# Altium PCB arduinoLeonardoOwn.PcbDoc
Units mil, origin at the board's own origin, x right, y up, seen from the top; angles counter-clockwise.
Board outline 1220 x 1715 mil, 2 copper layers (Top Layer, Bottom Layer); 26 components, 37 nets, 132 pads, 78 vias.
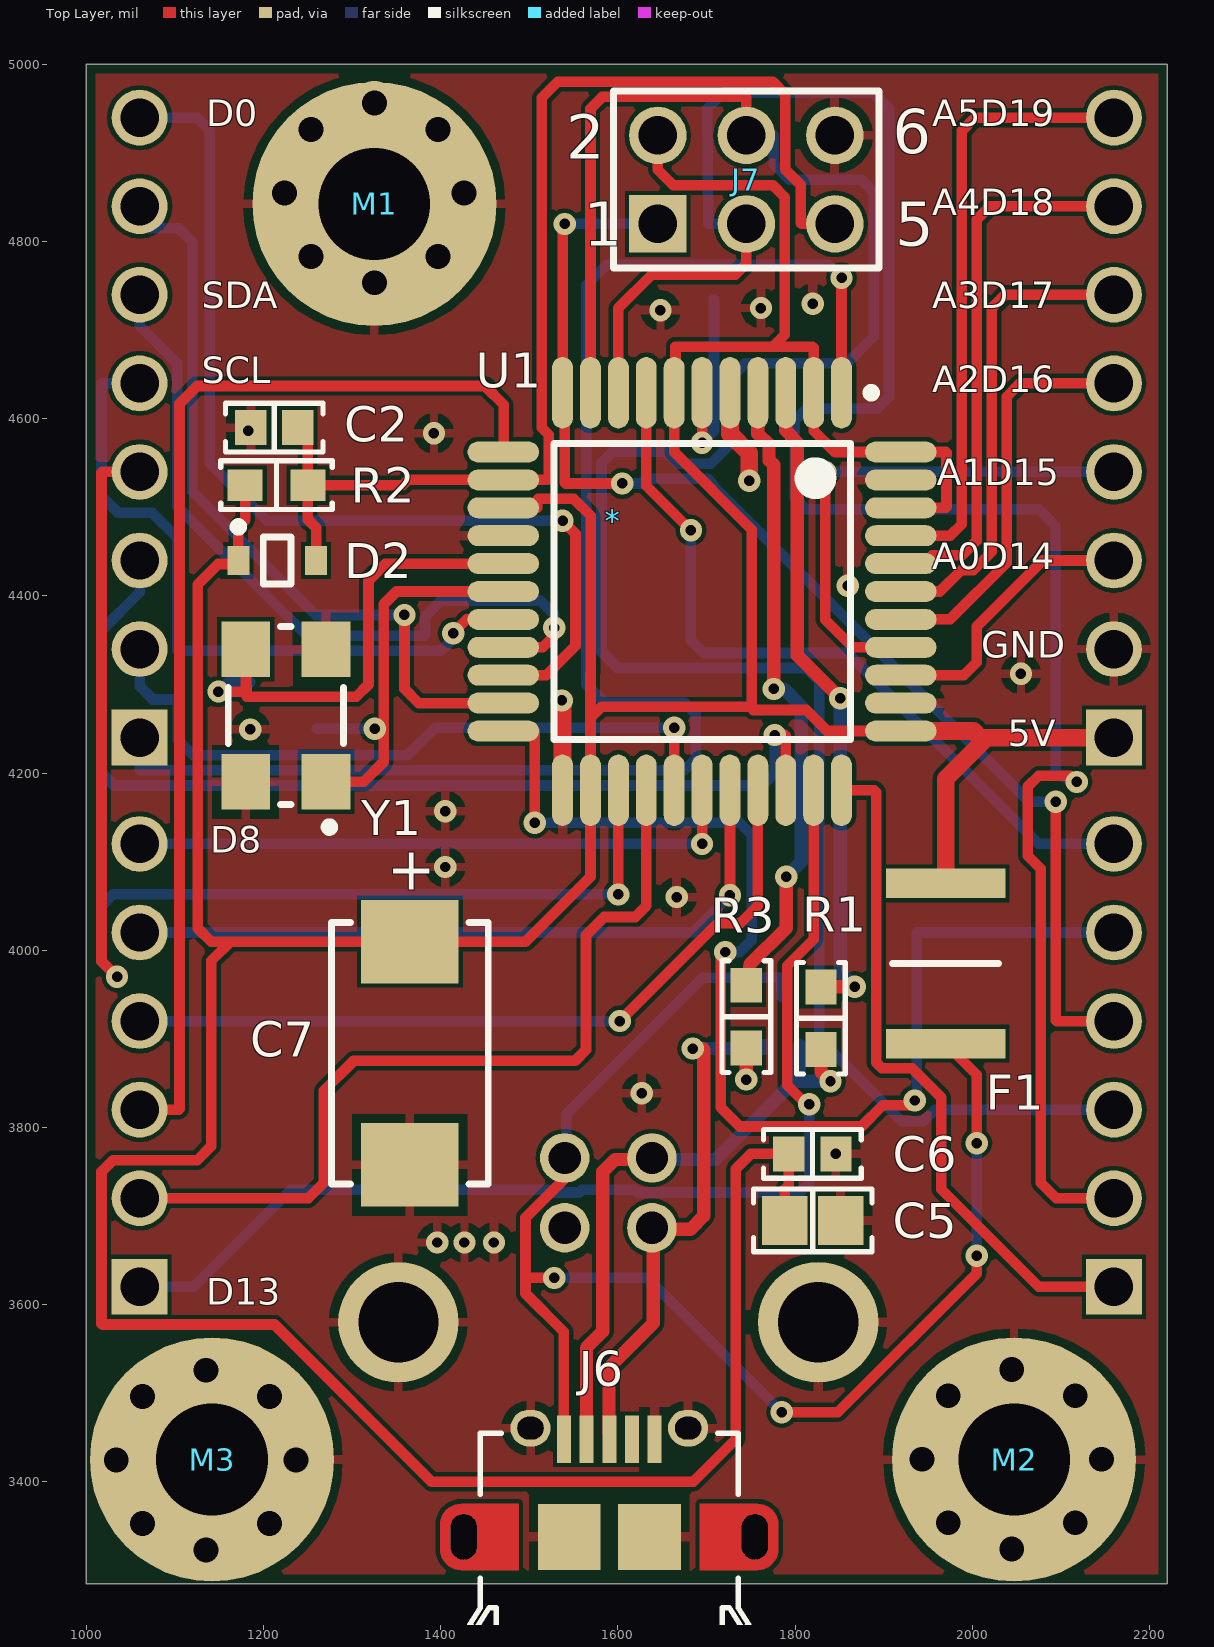
[diagram p0: Top Layer view]
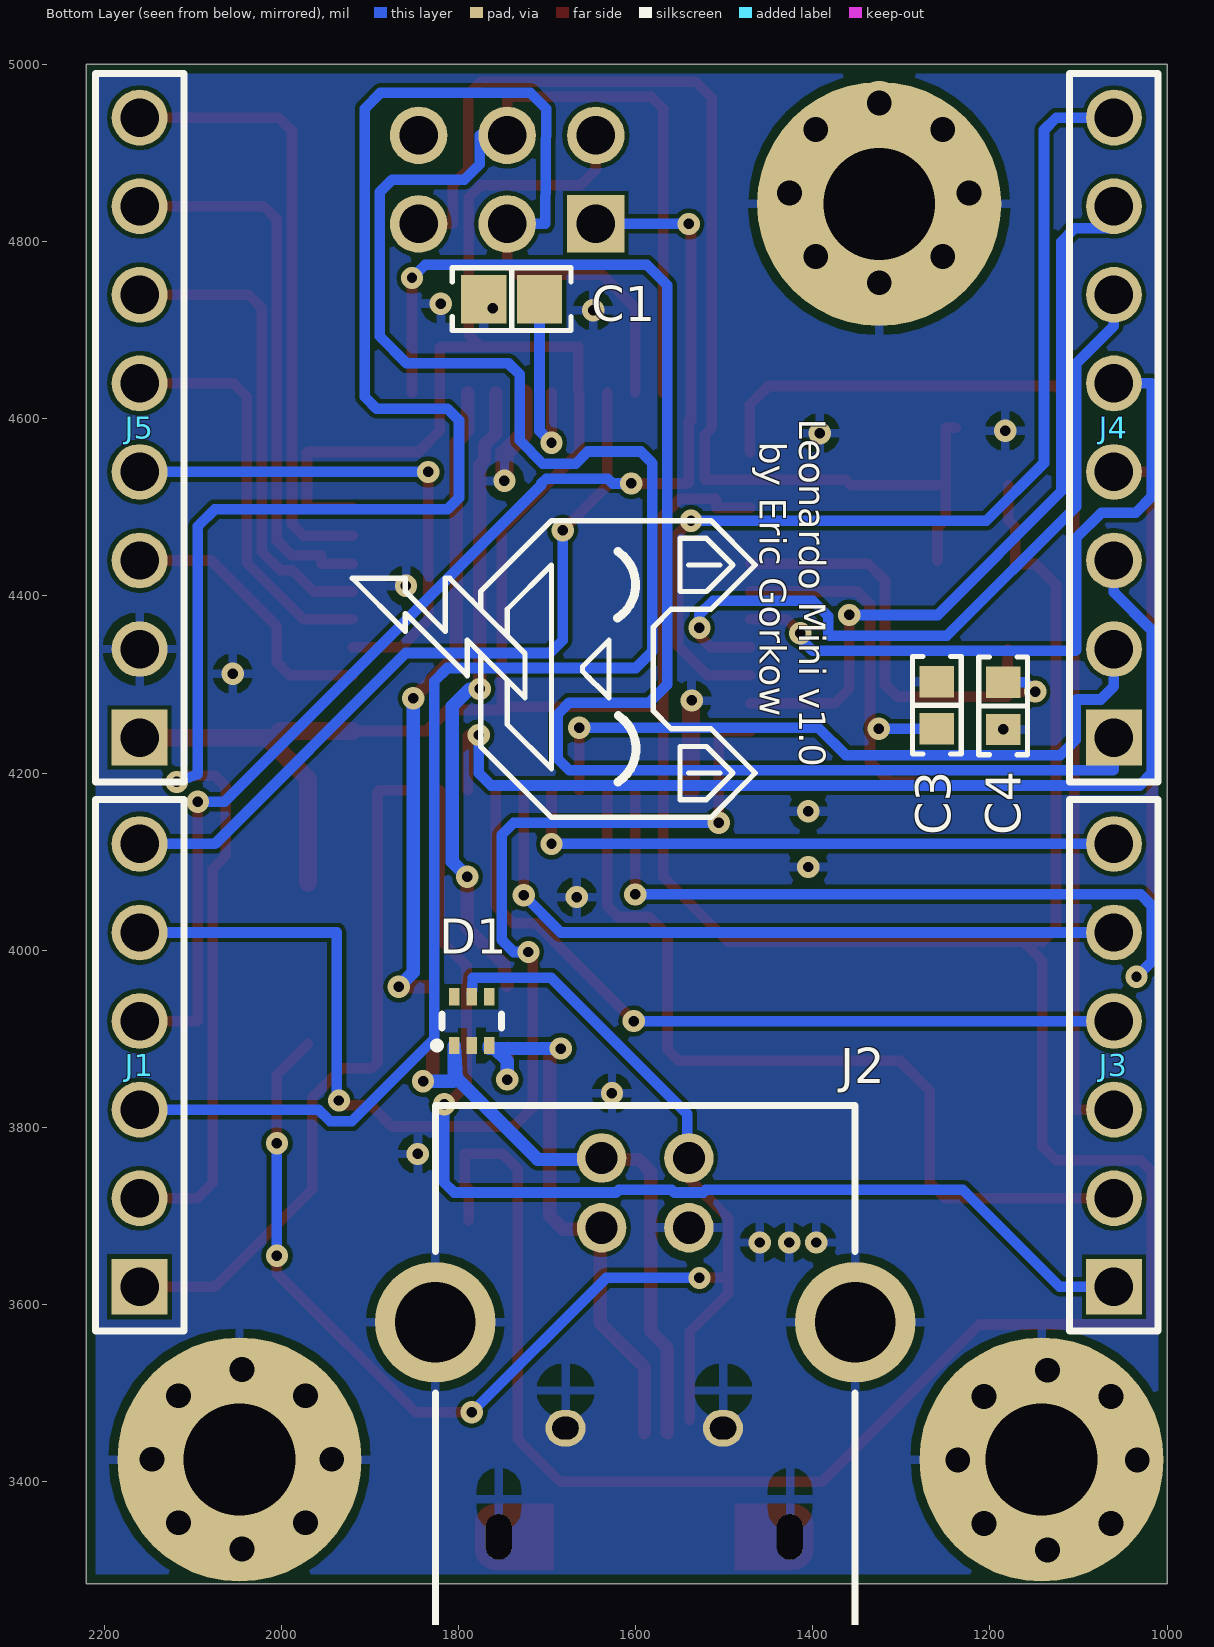
[diagram p1: Bottom Layer view, seen from below]
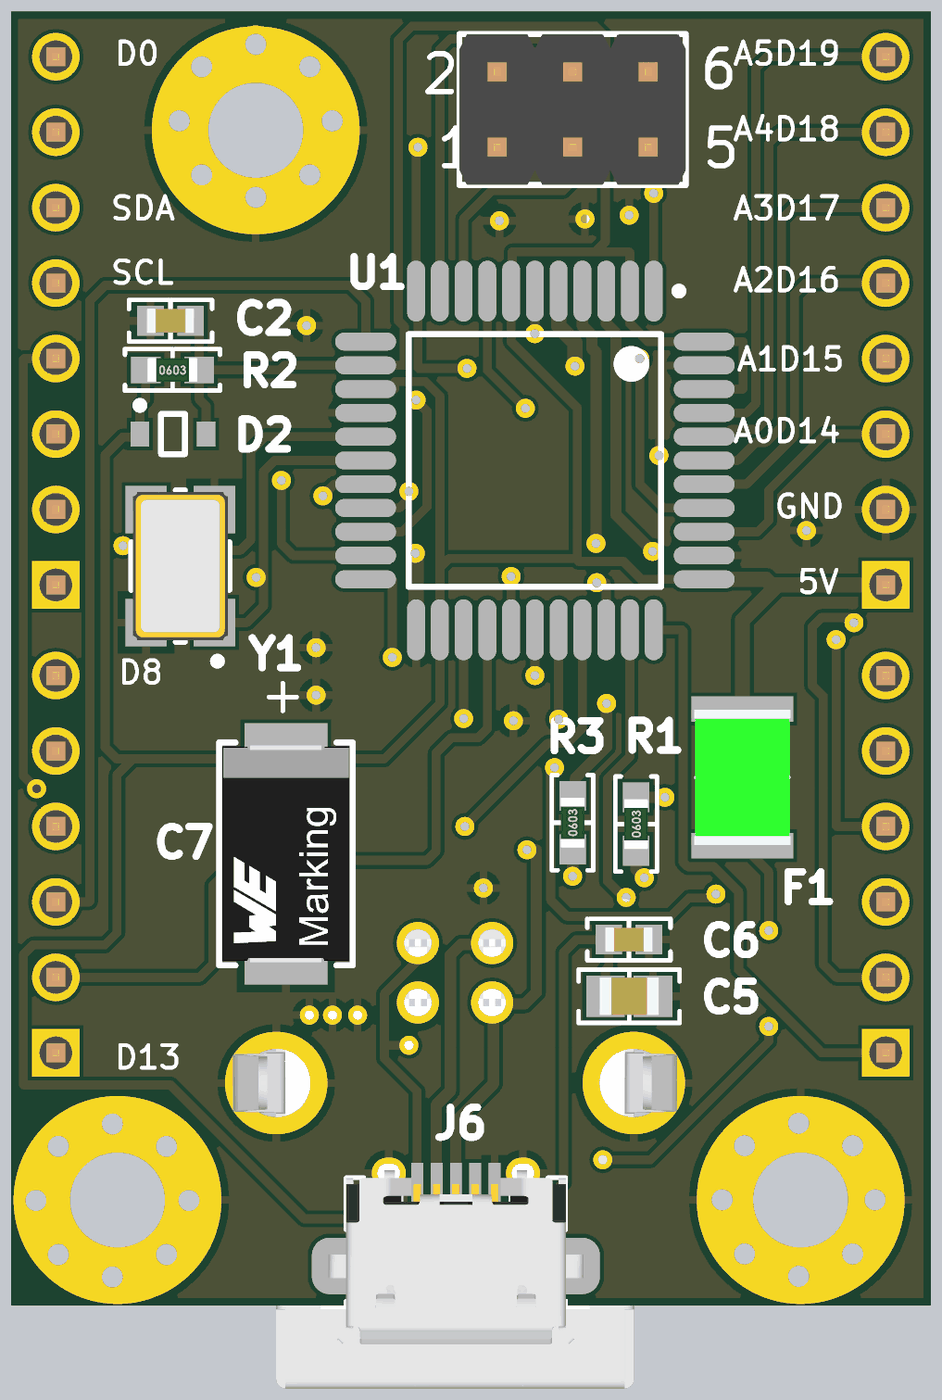
[diagram p2: 3D render of the assembled board from above, using the file's embedded part models]
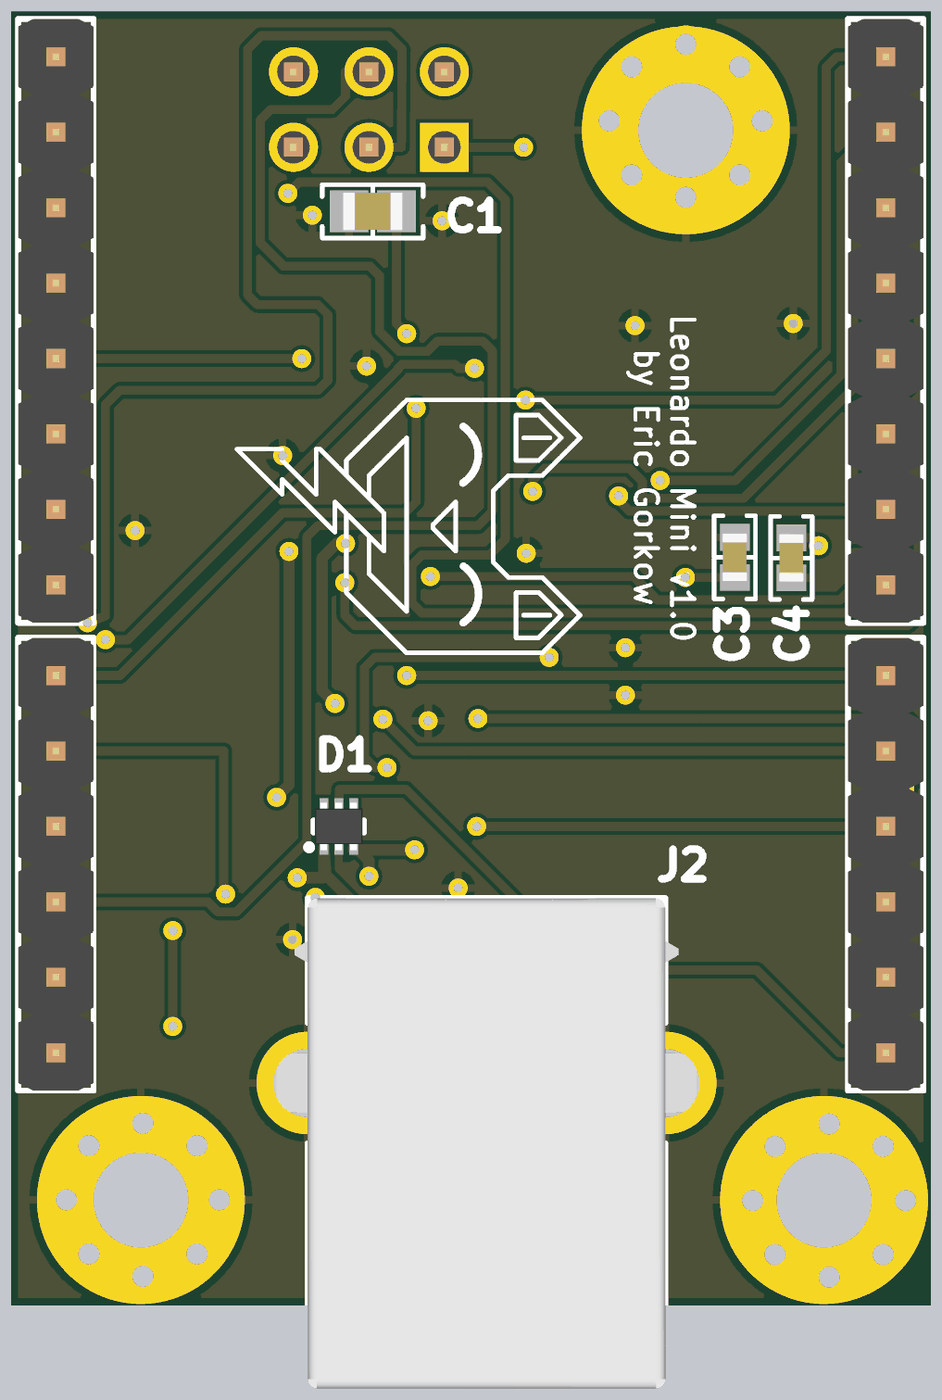
[diagram p3: 3D render of the assembled board from below, using the file's embedded part models]

## Layer stack, top to bottom
Top Solder: solder mask 0.4, Solder Resist, Dk 3.5
Top Layer: signal copper 1.4
Dielectric 1: dielectric 12.6, FR-4, Dk 4.8
Bottom Layer: signal copper 1.4
Bottom Solder: solder mask 0.4, Solder Resist, Dk 3.5

## Board outline
1000,3285 2220,3285 2220,5000 1000,5000

## Design rules (kind name [scope] priority, off if disabled: settings)
AcuteAngle [All] p1: minimum=4.50000000000000E+0001 checktracksonly=FALSE
BoardOutlineClearance [All] p1: gap=10 ignorepadtopadclearanceinfootprint=FALSE
Clearance [All] p1: gap=5 ignorepadtopadclearanceinfootprint=FALSE
ComponentClearance [All] p1: gap=3.94 collisioncheckmode=3 verticalgap=10 showdistances=FALSE
DiffPairsRouting [All] p1: maxlimit=10 minlimit=3.94 mostfreqgap=10 toplayer_minwidth=11.81 toplayer_maxwidth=15 toplayer_prefwidth=15 bottomlayer_minwidth=11.81 bottomlayer_maxwidth=15 bottomlayer_prefwidth=15 maxuncoupledlength=500
FanoutControl Fanout_Small [All] p1 off: bgadir=Out bgaviamode=Centered fanoutstyle=Auto fanoutdirection=Alternating viagrid=1 // Protel DXP Scope 1 Expression Was: (CompPinCount < 5)   Fanout_Small (Default Rule)
FanoutControl Fanout_Default [All] p2: bgadir=Out bgaviamode=Centered fanoutstyle=Auto fanoutdirection=Alternating viagrid=1 // Fanout_Default (Default Rule)
FanoutControl Fanout_SOIC [All] p3 off: bgadir=Out bgaviamode=Centered fanoutstyle=Auto fanoutdirection=Alternating viagrid=1 // Protel DXP Scope 1 Expression Was: IsSOIC   Fanout_SOIC (Default Rule)
FanoutControl Fanout_BGA [All] p4 off: bgadir=Out bgaviamode=Centered fanoutstyle=Auto fanoutdirection=Alternating viagrid=1 // Protel DXP Scope 1 Expression Was: IsBGA   Fanout_BGA (Default Rule)
FanoutControl Fanout_LCC [All] p5 off: bgadir=Out bgaviamode=Centered fanoutstyle=Auto fanoutdirection=Alternating viagrid=1 // Protel DXP Scope 1 Expression Was: IsLCC   Fanout_LCC (Default Rule)
HoleSize [All] p1: absolutevalues=TRUE maxlimit=275.59 minlimit=7.87 maxpercent=80.000 minpercent=20.000
MinimumAnnularRing [All] p1: minimumring=2.99
MinimumSolderMaskSliver [All] p1: minsoldermaskwidth=7.87
PolygonConnect [All] p1: connectstyle=Relief reliefconductorwidth=10 reliefentries=4 polygonreliefangle="90 Angle" airgapwidth=10
RoutingVias [All] p1: holewidth=11.81 width=25.2 viastyle="Through Hole" minholewidth=11.81 minwidth=24 maxholewidth=28 maxwidth=50
SMDEntry [All] p1 off: side=TRUE corner=TRUE anyangle=FALSE // Protel DXP Scope 1 Expression Was: not IsRoundPad
SMDToCorner [All] p1: distance=60000
SilkToSolderMaskClearance [All] p1 off: minsilkscreentomaskgap=10 clearancetoexposedcopper=TRUE // Protel DXP Scope 1 Expression Was: IsPad
SolderMaskExpansion ViaTenting [IsVia] p1: expansion=-393.7
SolderMaskExpansion [All] p2: expansion=0
Width [All] p1: maxlimit=118.11 minlimit=6 preferedwidth=12
20 further rules are at their usual default settings.

## Classes and differential pairs
differential pair USB_D: +USB_D_P -USB_D_N
differential pair MCU_D: +MCU_D_P -MCU_D_N

## Components (designator, comment, footprint, x,y, rotation, side; value= is the part's Value field where it differs from the comment)
* "Signature" Signature 1595,4485 r270 top
C1 "SMD Capacitor; 1u; 6.3V" "CAP 0805/2012" 1740,4735 r180 bottom value=1u
C2 "SMD Capacitor; 100n; 6.3V" "CAP 0603/1608" 1212.05,4590 r0 top value=100n
C3 "SMD Capacitor; 22p; 6.3V" "CAP 0603/1608" 1260,4276.57 r270 bottom value=22p
C4 "SMD Capacitor; 22p; 6.3V" "CAP 0603/1608" 1185,4275.83 r90 bottom value=22p
C5 "SMD Capacitor; 1u; 6.3V" "CAP 0805/2012" 1820,3695 r180 top value=1u
C6 "SMD Capacitor; 100n; 6.3V" "CAP 0603/1608" 1819.61,3770 r180 top value=100n
C7 "220 uF, 6.3 VDC" WCAP-PHGP_7.3x4.3x1.9 1365,3883.64 r90 top
D1 "5 Vdc, 2+1 Channel" "WE-TVS_High Speed_SOT563" 1785,3920 r180 bottom
D2 "NSR1020MW2T1G" ONSC-SOD-323-2-477-02_V 1215.31,4440 r0 top
F1 "MF-MSMF200-2" FUSC4632X85N 1970,3985 r90 top
J1 "61300611121" 61300611121 2160,3870 r90 bottom
J2 "USB 2.0 Type B Receptacle" 61400416121 1589.14,3500.08 r180 bottom
J3 "61300611121" 61300611121 1060,3870 r90 bottom
J4 "61300811121" 61300811121 1060,4590 r90 bottom
J5 "61300811121" 61300811121 2160,4590 r90 bottom
J6 "Micro USB 2.0 Type AB Receptacle" 629105150921 1590.28,3337.6 r0 top
J7 "61300621121" 61300621121 1745,4870 r0 top
M1 "mounting pad" MOUNTING_PAD_M3#1 1325,4855 r0 top
M2 "mounting pad" MOUNTING_PAD_M3#2 2044.58,3425.2 r0 top
M3 "mounting pad" MOUNTING_PAD_M3#3 1135,3424.32 r0 top
R1 "SMD Resistor; 22" "STACKPOLE CSR0603" 1829.21,3923.18 r90 top value=22
R2 "SMD Resistor; 10k" "STACKPOLE CSR0603" 1214.57,4525.03 r0 top value=10k
R3 "SMD Resistor; 22" "STACKPOLE CSR0603" 1745,3925 r90 top value=22
U1 "ATmega32U4-AU" 44ML_M 1695,4405 r270 top
Y1 "16MHz, +/-50ppm, 18pF" WE-XTAL_CFPX-104 1225,4265 r90 top

## Footprints (in the part's own frame and the unit in brackets; to place one, negate y for a bottom-side part, rotate by r counter-clockwise, add the part's x,y. Pads: shape width x height; smd on the part's side, far side on the other; paste and mask are expansions set on the pad)
44ML_M [mm] "Thin QFP, 44-Leads, Body 10x10mm, Pitch 0.8mm, IPC Low Density"
  oval 2.05x0.6 smd: 1(-5.7,4) 2(-5.7,3.2) 3(-5.7,2.4) 4(-5.7,1.6) 5(-5.7,0.8) 6(-5.7,0) 7(-5.7,-0.8) 8(-5.7,-1.6) 9(-5.7,-2.4) 10(-5.7,-3.2) 11(-5.7,-4) 23(5.7,-4) 24(5.7,-3.2) 25(5.7,-2.4) 26(5.7,-1.6) 27(5.7,-0.8) 28(5.7,0) 29(5.7,0.8) 30(5.7,1.6) 31(5.7,2.4) 32(5.7,3.2) 33(5.7,4)
  oval 0.6x2.05 smd: 12(-4,-5.7) 13(-3.2,-5.7) 14(-2.4,-5.7) 15(-1.6,-5.7) 16(-0.8,-5.7) 17(0,-5.7) 18(0.8,-5.7) 19(1.6,-5.7) 20(2.4,-5.7) 21(3.2,-5.7) 22(4,-5.7) 34(4,5.7) 35(3.2,5.7) 36(2.4,5.7) 37(1.6,5.7) 38(0.8,5.7) 39(0,5.7) 40(-0.8,5.7) 41(-1.6,5.7) 42(-2.4,5.7) 43(-3.2,5.7) 44(-4,5.7)
  silkscreen extent -5.82,-4.25 4.25,4.98, body extent -5,-5 5,5, height 1.2
61300611121 [mm] "6 pins, 1 row, straight, gold plating"
  rect 1.6x1.6 hole 1.1: 1(-6.35,0)
  round 1.6 hole 1.1: 2(-3.81,0) 3(-1.27,0) 4(1.27,0) 5(3.81,0) 6(6.35,0)
  silkscreen extent -7.62,-1.27 7.62,1.27, body extent -7.62,-1.27 7.62,1.27, height 8.57
61300621121 [mm] "2.54 mm THT Dual Pin Header, 6p"
  rect 1.65x1.65 hole 1.1: 1(-2.54,-1.27)
  round 1.65 hole 1.1: 2(-2.54,1.27) 3(0,-1.27) 4(0,1.27) 5(2.54,-1.27) 6(2.54,1.27)
  silkscreen extent -3.81,-2.54 3.81,2.54, body extent -3.81,-2.54 3.81,2.54, height 8.59
61300811121 [mm] "8 pins, 1 row, straight, gold plating"
  rect 1.6x1.6 hole 1.1: 1(-8.89,0)
  round 1.6 hole 1.1: 2(-6.35,0) 3(-3.81,0) 4(-1.27,0) 5(1.27,0) 6(3.81,0) 7(6.35,0) 8(8.89,0)
  silkscreen extent -10.16,-1.27 10.16,1.27, body extent -10.16,-1.27 10.16,1.27, height 8.57
61400416121 [mm] "USB 2.0 Type B Horizontal"
  round 1.42 hole 0.92: 1(1.25,6.74) 2(-1.25,6.74) 3(-1.25,4.74) 4(1.25,4.74)
  round 3.45 hole 2.3: Shell(-6.02,2.03) Shell(6.02,2.03)
  silkscreen extent -6.02,-8.25 6.02,8.25, body extent -7.48,-8.25 7.48,8.25, height 11.15
629105150921 [mm] "Micro USB 2.0 Type AB, Receptacle, Horizontal, SMT"
  rect 0.4x1.35 smd: 1(-1.3,2.8) 2(-0.65,2.8) 3(0,2.8) 4(0.65,2.8) 5(1.3,2.8)
  oval 0.75x1.3 hole 0.75 slot 1.3 at 90 deg: Shell(-4.175,0) Shell(4.175,0)
  oval 1.15x1.05 hole 0.65 slot 0.75 at 0 deg: Shell(-2.26,3.12) Shell(2.26,3.12)
  rect 1.8x1.9 smd: Shell(-1.15,0) Shell(1.15,0)
  Top Layer region: -4.25,-0.95 -4.48,-0.904 -4.674,-0.774 -4.804,-0.58 -4.85,-0.35 -4.85,-0.35 -4.85,0.35 -4.804,0.58 -4.674,0.774 -4.48,0.904 -4.25,0.95 -4.25,0.95 -2.6,0.95 -2.6,-0.95
  Top Layer pour cut-out: -4.25,-0.65 -4.365,-0.627 -4.462,-0.562 -4.527,-0.465 -4.55,-0.35 -4.55,-0.35 -4.55,0.35 -4.527,0.465 -4.462,0.562 -4.365,0.627 -4.25,0.65 -4.25,0.65 -4.1,0.65 -3.985,0.627 -3.888,0.562 -3.823,0.465 -3.8,0.35 -3.8,0.35 -3.8,-0.35 -3.823,-0.465 -3.888,-0.562 -3.985,-0.627 -4.1,-0.65 -4.1,-0.65
  Top Layer region: 4.25,-0.95 4.48,-0.904 4.674,-0.774 4.804,-0.58 4.85,-0.35 4.85,-0.35 4.85,0.35 4.804,0.58 4.674,0.774 4.48,0.904 4.25,0.95 4.25,0.95 2.6,0.95 2.6,-0.95
  silkscreen extent -4,-2.64 4,2.97, body extent -4.3,-2.64 4.3,3.23, height 2.76
"CAP 0603/1608" [mm] "Chip Capacitor, 2-Leads, Body 1.60x0.80mm, IPC Medium Density"
  rect 0.9x1 smd: 1(-0.675,0) 2(0.675,0)
  silkscreen extent -1.4,-0.7 1.4,0.7, body extent -0.8,-0.41 0.8,0.41, height 0.82
"CAP 0805/2012" [mm] "Chip Capacitor, 2-Leads, Body 2.00x1.20mm, IPC Medium Density"
  rect 1.3x1.4 smd: 1(-0.8,0) 2(0.8,0)
  silkscreen extent -1.7,-0.9 1.7,0.9, body extent -1,-0.64 1,0.64, height 1.26
FUSC4632X85N [mm]
  rect 0.85x3.43 smd: 1(-2.3,0) 2(2.3,0)
  silkscreen extent 0,-1.52 0,1.52, body extent -2.27,-1.62 2.28,1.62, height 0.85
MOUNTING_PAD_M3#1 [mm] "M3 mounting pad"
  round 7 hole 3.2: 1(0,-0.317)
MOUNTING_PAD_M3#2 [mm] "M3 mounting pad"
  round 7 hole 3.2: 1(0.068,-0.005)
MOUNTING_PAD_M3#3 [mm] "M3 mounting pad"
  round 7 hole 3.2: 1(0.171,0.017)
ONSC-SOD-323-2-477-02_V [mm] "SOD, 2-Leads, Body 1.7x1.25mm"
  rect 0.63x0.83 smd: 1(-1.115,0) 2(1.115,0)
  silkscreen extent -1.24,-0.67 0.4,1.09, body extent -0.85,-0.63 0.85,0.63, height 1.06
Signature [mil]
"STACKPOLE CSR0603" [mm] "Chip Resistor, 2-Leads, Body 1.60x0.80mm, IPC Medium Density"
  rect 1x0.9 smd: 1(-0.9,0) 2(0.9,0)
  silkscreen extent -1.6,-0.7 1.6,0.7, body extent -0.85,-0.4 0.85,0.4, height 0.45
WCAP-PHGP_7.3x4.3x1.9 [mm] "Aluminum Polymer Capacitors, body 7.3x4.3mm"
  rect 2.4x2.8 smd: 1(-3.2,0) 2(3.2,0)
  silkscreen extent -3.75,-2.25 3.75,2.25, body extent -3.65,-2.15 3.65,2.15, height 1.9
"WE-TVS_High Speed_SOT563" [mm] "TVS Diode, package SOT563"
  rect 0.3x0.5 smd: 1(-0.5,-0.7) 2(0,-0.7) 3(0.5,-0.7) 4(0.5,0.7) 5(0,0.7) 6(-0.5,0.7)
  silkscreen extent -1.1,-0.8 0.85,0.2, body extent -0.8,-0.8 0.8,0.8, height 0.54
WE-XTAL_CFPX-104 [mm] "Quartz Crystal, size CFPX-104, body 5x3.2mm"
  rect 1.6x1.4 smd: 1(-1.9,-1.15) 2(1.9,-1.15) 3(1.9,1.15) 4(-1.9,1.15)
  silkscreen extent -3.32,-1.65 2.55,1.65, body extent -2.5,-1.6 2.5,1.6, height 0.95

## Part data
C1 C2 C3 C4 C5 C6: library part "SMD Capacitor", "Capacitor with multiple Footprints", VoltageRating=6.3V
C7: library part 875015119006, "Aluminum Polymer Capacitors WCAP-PHGP, 220 uF, 6.3 VDC", Capacitance="220 uF", ESR Resistance="15 mOhm", Leakage Current="138.6 uA", Operating Temperature="-55 to +105 degC", Rated Voltage="6.3 VDC", Ripple Current="5.1 A", ComponentLink1Description=Manufacturer, ComponentLink1URL=http://www.we-online.de, ComponentLink2Description=Datasheet, ComponentLink2URL=https://katalog.we-online.de/pbs/datasheet/875015119006.pdf, Dissipation Factor=6%, Endurance="2000 h", Mounting Technology=SMT, Packaging="Tape and Reel", Part Number=875015119006, Published Date="November 2018", Publisher="Wurth Elektronik", Size=7.3x4.3x1.9
D1: library part 82400152, "TVS Diode - High Speed Series WE-TVS, SOT563, 5 Vdc, 2+1 Channel", Channel Input Capacitance="2 pF", DC Operating Voltage="5 V", Operating Temperature="-40 to 125 degC", Reverse Breakdown Voltage min.="6 V", Reverse Channel Leakage Current="5 uA", Reverse Peak Pulse Current="6 A", Channel=2+1, ComponentLink1Description=Manufacturer, ComponentLink1URL=http://www.we-online.de, ComponentLink2Description=Datasheet, ComponentLink2URL=https://katalog.we-online.de/pbs/datasheet/82400152.pdf, Mounting Technology=SMT, Packaging="Tape and Reel", Part Number=82400152, Published Date="November 2018", Publisher="Wurth Elektronik", Size=SOT563
D2: library part CMP-1055-00471-1, "Schottky Barrier Diode, 2-Pin SOD-323, Pb-Free, Tape and Reel", Manufacturer="On Semiconductor", ComponentLink1Description="Manufacturer URL", ComponentLink1URL=http://www.onsemi.com/, ComponentLink2Description=Datasheet, ComponentLink2URL=http://www.onsemi.cn/pub_link/Collateral/NSR1020MW2T1-D.PDF, ComponentLink3Description="Package Specification", ComponentLink3URL=http://www.onsemi.com/pub_link/Collateral/477-02.PDF.1, Configuration=Single, DatasheetVersion="Rev. 1", IFSM Max (A)=5, Mounting Technology="Surface Mount", PackageDescription="2-Pin SOD, Body 1.7 x 1.25 mm", PackageReference=SOD-323-2-477-02, PackageVersion="Rev. H, 03/2007", Packing="Tape and Reel", PartNumber=NSR1020MW2T1G, RoHS=TRUE
F1: "Fuse", Manufacturer_Name=Bourns, Mouser2 Part Number=652-MF-MSMF200-2, Datasheet Link=https://componentsearchengine.com//MF-MSMF200-2.pdf, Height=0.85mm, Manufacturer_Part_Number=MF-MSMF200-2, Mouser2 Price/Stock=https://www.mouser.com/Search/Refine.aspx?Keyword=652-MF-MSMF200-2
J1 J3: "WR-PHD 2.54 mm THT Pin Header, 6p", Rated Current="3 A", Withstanding Voltage="500 VAC", Working Voltage="250 VAC", ComponentLink1Description=Manufacturer, ComponentLink1URL=http://www.we-online.de, ComponentLink2Description=Datasheet, ComponentLink2URL=http://katalog.we-online.de/em/datasheet/6130xx11121.pdf, Part Number=61300611121, Pin Number=6, Pitch="2.54 mm", Published Date="Aug 2017", Publisher="Wurth Elektronik"
J2: library part 61400416121, "USB 2.0 Type B, Receptacle, Horizontal, THT", Manufacturer="Wurth Elektronik", Operating Temperature="-40 to +105degC", Rated Current=1.5A, Working Voltage=30VAC, Application="USB 2.0", ComponentLink1Description=Manufacturer, ComponentLink1URL=http://www.we-online.de, ComponentLink2Description=Datasheet, ComponentLink2URL=https://katalog.we-online.com/em/datasheet/61400416121.pdf, Gender=Receptacle, Interface Type="Type B", Manufacturer Part Number=61400416121, Mounting Technology=THT, Packaging=Tray, Pin Number=4, Published Date="August 2020", Type=Horizontal
J4 J5: "WR-PHD 2.54 mm THT Pin Header, 8p", Rated Current="3 A", Withstanding Voltage="500 VAC", Working Voltage="250 VAC", ComponentLink1Description=Manufacturer, ComponentLink1URL=http://www.we-online.de, ComponentLink2Description=Datasheet, ComponentLink2URL=http://katalog.we-online.de/em/datasheet/6130xx11121.pdf, Part Number=61300811121, Pin Number=8, Pitch="2.54 mm", Published Date="Aug 2017", Publisher="Wurth Elektronik"
J6: library part 629105150921, "Micro USB 2.0 Type AB, Receptacle, Horizontal, SMT", Manufacturer="Wurth Elektronik", Operating Temperature="-40 to +85degC", Rated Current=1.8A, Working Voltage=30VAC, Application="Micro USB 2.0", ComponentLink1Description=Manufacturer, ComponentLink1URL=http://www.we-online.de, ComponentLink2Description=Datasheet, ComponentLink2URL=https://katalog.we-online.com/em/datasheet/629105150921.pdf, Gender=Receptacle, Interface Type="Type AB", Manufacturer Part Number=629105150921, Mounting Technology=SMT, Packaging="Tape and Reel", Pin Number=5, Published Date="August 2020", Type=Horizontal
J7: "WR-PHD 2.54 mm THT Dual Pin Header, 6p", Rated Current="3 A", Withstanding Voltage="500 VAC", Working Voltage="250 VAC", ComponentLink1Description=Manufacturer, ComponentLink1URL=http://www.we-online.de, ComponentLink2Description=Datasheet, ComponentLink2URL=http://katalog.we-online.de/em/datasheet/6130xx21121.pdf, Part Number=61300621121, Pin Number=6, Pitch="2.54 mm", Published Date="Aug 2017", Publisher="Wurth Elektronik"
R1 R2 R3: library part "SMD Resistor", "Resistor with multiple footprints"
U1: library part CMP-0095-00285-2, "8-bit AVR Microcontroller, 2.7-5.5V, 16MHz, 32KB Flash, 1KB EEPROM, 2.5KB SRAM, USB Controller, 44-pin TQFP, Industrial Grade (-40°C to 85°C), Ext Osc", ComponentLink1Description="Manufacturer URL", ComponentLink1URL=http://www.atmel.com/, ComponentLink2Description="ATmega16U4/32U4 Datasheet", ComponentLink2URL=http://www.atmel.com/dyn/resources/prod_documents/doc7766.pdf, ComponentLink3Description="ATmega16U4 ATmega32U4 Summary", ComponentLink3URL=http://www.atmel.com/dyn/resources/prod_documents/7766S.pdf, DatasheetVersion="revF, Nov-2010", PackageDescription="44-Pin Plastic Thin Quad Flat Pack, 10 x 10 x 1.0 mm Body, 0.8 mm Pitch (TQFP)", PackageReference=44ML, PackageVersion="rev.G, Jul-2007", RevisionNote="DatasheetVersion updated. URLs added."
Y1: library part 830030819, "WE-XTAL Quartz Crystal, size CFPX-104, 16MHz, +/-50ppm, 18pF", Frequency=16MHz, Frequency Stability=50ppm, Frequency Tolerance=+/-50ppm, Load Capacitance=18pF, Operating Temperature="-10 up to +60degC", ComponentLink1Description=Manufacturer, ComponentLink1URL=http://www.we-online.de, ComponentLink2Description=Datasheet, ComponentLink2URL=https://katalog.we-online.com/pbs/datasheet/830030819.pdf, Mounting Technology=SMT, Packaging="Tape and Reel", Part Number=830030819, Published Date="March 2019", Publisher="Wurth Elektronik", Size=CFPX-104

## Via types
v1: diameter 25.2, hole 11.81, Top Layer to Bottom Layer, 54 vias
v2: diameter 50, hole 28, Top Layer to Bottom Layer, 24 vias

## Nets (pads, with @x,y where several pads share a name; then routed paths per layer and width w, separated by ;. In a path a pad name is that pad's centre, name@x,y a point inside that pad or via, vN(x,y) a via of type N, cw(c..) or ccw(c..) an arc to the next point about the centre after c; other vN are vias at no path point)
+5V: C5.2 C6.2 C7.2 D2.1 F1.2 J5.1 J7.2 R2.1 U1.2 U1.7 U1.14 U1.24 U1.34 U1.42 U1.44 | length 5454.5
  Top Layer w12: R2.1 1179.13,4485.72 1171.41,4478 D2.1 1171.41,4436 1148.9,4436 1125.4,4412.5 1125.4,4025 1140.78,4009.62 1162.5,4009.62 ; U1.14 1508.9,4499.49 1508.9,4508.41 1510,4509.51 1550,4509.51 1569.14,4490.37 1569.14,4312.19 1569.02,4312.06 1569.02,4262.5 ; J7.2 1645,4880.98 1662.5,4863.48 1775,4863.48 1788.48,4850 1788.48,4694.96 1775,4681.48 ; C5.2 1788.5,3730 1793.03,3734.53 C6.2 1750,3770 1733,3753 1733,3447.98 1685.02,3400 1389.59,3400 1212.23,3577.36 1018,3577.36 1017,3578.36 1017,3750 1030,3763 1125,3763 1141,3779 1141,3988.12 1162.5,4009.62 ; U1.34 1836.17,4247.52 1812.5,4271.19 1752.94,4271.19 1751.13,4273 ; U1.42 1970,4499.49 1971,4500.49 1971,4561.48 1970,4562.48 U1.44 1845.1,4562.48 1820.98,4586.6 U1.2 1820.98,4680 1819.51,4681.48 1775,4681.48 ; 1162.5,4009.62 C7.2 1495.62,4009.62 1569.02,4083.02 U1.24 1569.02,4262.5 ; 1569.02,4262.5 1581.52,4275 1749.13,4275 1751.13,4273 ; 1751.13,4273 1751.13,4474.87 1663.5,4562.5 U1.7 1664.98,4630.89 1664.98,4681.48 1775,4681.48
  Top Layer w20: U1.34 2001.48,4247.52 2009,4240 2016.48,4240 ; F1.2 1970,4193.52 2016.48,4240 ; J5.1@2136.81,4240 2016.48,4240
A0D14: J5.3 U1.36 | length 294.8
  Top Layer w12: U1.36 1990.51,4310.51 2005,4325 2005,4365.5 2079.5,4440 J5.3@2136.81,4440
A1D15: J5.4 U1.37 | length 568.1
  Top Layer w12: v1(1834,4540) 1834,4373.01 1865,4342.01 U1.37
  Bottom Layer w12: v1(1834,4540) J5.4@2136.81,4540
A2D16: J5.5 U1.38 | length 437.6
  Top Layer w12: U1.38 1975,4373.5 2039,4437.5 2039,4625 2054,4640 J5.5@2136.81,4640
A3D17: J5.6 U1.39 | length 517.3
  Top Layer w12: U1.39 1963.5,4405 1987.5,4429 2001,4429 2022,4450 2022,4725 2037,4740 J5.6@2136.81,4740
A4D18: J5.7 U1.40 | length 602.5
  Top Layer w12: U1.40 1955,4436.5 1955,4446 1988.5,4446 2005,4462.5 2005,4825 2020,4840 J5.7@2136.81,4840
A5D19: J5.8 U1.41 | length 673
  Top Layer w12: U1.41 1975,4467.99 1988,4480.99 1988,4925 2003,4940 J5.8@2136.81,4940
D0: J4.8 U1.20 | length 1128.9
  Top Layer w12: U1.20 1518.95,4310.51 1552.14,4343.71 1552.14,4470.36 v1(1537.5,4485)
  Bottom Layer w12: J4.8 1125,4940 1139,4926 1139,4550 1204,4485 v1(1537.5,4485)
D1: J4.7 U1.21 | length 871.7
  Top Layer w12: v1(1359,4378.5) 1359,4295.02 1375,4279.02 U1.21
  Bottom Layer w12: J4.7 1060,4815 1104.5,4815 1119.5,4800 1119.5,4518 1259,4378.5 v1(1359,4378.5)
D2SDA: J4.6 U1.19 | length 864.8
  Top Layer w12: U1.19 1515,4342.01 1528,4355.01 v1(1528,4364)
  Bottom Layer w12: J4.6 1060,4705 1102.5,4662.5 1102.5,4501 1248.6,4354.9 1381.5,4354.9 1382.6,4356 1382.6,4377.2 1400,4394.6 1512.5,4394.6 1528,4379.1 v1(1528,4364)
D3SCL: J4.5 U1.18 | length 788.3
  Top Layer w12: v1(1414,4358) 1429.5,4373.5 U1.18
  Bottom Layer w12: J4.5 1018,4640 1017,4639 1017,4512.5 1035.5,4494 1074,4494 1102.5,4465.5 1102.5,4339 1103.6,4337.9 1400,4337.9 1414,4351.9 v1(1414,4358)
D4: J4.4 U1.25 | length 1413.4
  Top Layer w12: v1(1034.5,3970) 1017,3987.5 1017,4539 1018,4540 J4.4 ; v1(1600.51,4063) U1.25
  Bottom Layer w12: v1(1034.5,3970) 1017,3987.5 1017,4050 1030,4063 v1(1600.51,4063)
D5: J4.3 U1.31 | length 1146.7
  Top Layer w12: v1(1776.99,4243) 1788.49,4243 1789.49,4242 U1.31
  Bottom Layer w12: J4.3 1060,4404 1017,4361 1017,4200 1031,4186 1762.99,4186 1776.99,4200 v1(1776.99,4243)
D6: J4.2 U1.27 | length 787.4
  Top Layer w12: U1.27 v1(1663.5,4251.18)
  Bottom Layer w12: J4.2 1060,4298 1075,4283 1102,4283 1103,4282 1103,4237.5 1120.5,4220 1362.5,4220 1393.68,4251.18 v1(1663.5,4251.18)
D7: J4.1 U1.1 | length 1742.2
  Top Layer w12: U1.1 v1(1852.48,4759.02)
  Bottom Layer w12: J4.1 1060,4204 1061,4203 1675,4203 1688,4216 1688,4266.6 1675,4279.6 1584.8,4279.6 1564.4,4300 1564.4,4750.9 1587.5,4774 1837.5,4774 v1(1852.48,4759.02)
D8: J3.6 U1.28 | length 695.6
  Top Layer w12: v1(1695,4120) U1.28
  Bottom Layer w12: J3.6 v1(1695,4120)
D9: J3.5 U1.29 | length 802.4
  Top Layer w12: v1(1726.5,4062.1) U1.29
  Bottom Layer w12: J3.5 1684.4,4020 v1(1726.5,4062.1)
D10: J3.4 U1.30 | length 882.4
  Top Layer w12: v1(1602.2,3920) 1712.5,4030.3 1738.29,4030.3 1757.99,4050 U1.30
  Bottom Layer w12: J3.4 v1(1602.2,3920)
D11: J3.3 U1.12 | length 1278.3
  Top Layer w12: J3.3 1104,3820 1105,3821 1105,4617 1125,4637 1450,4637 1471,4616 1471,4562.48 U1.12
D12: J3.2 U1.26 | length 976.1
  Top Layer w12: J3.2 1250.5,3720 1268,3737.5 1268,3841.5 1301.5,3875 1551.5,3875 1564,3887.5 1564,4017 1584.5,4037.5 1619.51,4037.5 1632.01,4050 U1.26
D13: J3.1 U1.32 | length 1277.6
  Top Layer w12: v1(1816,3826) 1812.5,3826 1791,3847.5 1791,3982.51 1820.98,4012.5 U1.32
  Bottom Layer w12: J3.1 1121,3620 1230.53,3729.53 1520.74,3729.53 1523.79,3726.48 1556.06,3726.48 1559.11,3729.53 1619.17,3729.53 1622.22,3726.48 1804.98,3726.48 1816,3737.5 v1(1816,3826)
GND: C1.1 C2.1 C3.1 C4.1 C5.1 C6.1 C7.1 D1.2 J2.4 J2.Shell J5.2 J6.5 J6.Shell J7.6 M1.1 M2.1 M3.1 U1.5 U1.15 U1.23 U1.35 U1.43 Y1.2 Y1.4 | length 210.2
  Top Layer w20: v1(1536.57,4282) 1537.52,4281.06 U1.23 ; U1.5 1726.5,4582.82 1748.15,4561.17 v1(1748.15,4530)
  other v1: 1396.06,3670 1426.7,3670 1460,3670 1846.18,3770 1626.73,3838.41 1666.56,4060 1405,4093.97 1405,4156.9 1185,4249.25 2055,4312.06 1859.35,4411.56 1392.31,4583.73 1182.63,4586.47 1648.02,4722.58 1761.43,4725 1820,4730
  other v2: 1135,3322.94 2044.58,3323.82 1063.32,3352.64 1206.69,3352.64 1972.89,3353.51 2116.26,3353.51 1033.62,3424.32 1236.38,3424.32 1943.2,3425.2 2145.95,3425.2 1063.32,3496.01 1206.69,3496.01 1972.89,3496.88 2116.26,3496.88 1135,3525.7 2044.58,3526.57 1325,4753.62 1253.32,4783.32 1396.69,4783.32 1223.62,4855 1426.38,4855 1253.32,4926.69 1396.69,4926.69 1325,4956.38
MCU_D_N: R1.2 U1.3 | length 741.2
  Top Layer w15: U1.3 1789.49,4587.01 1795.65,4580.85 1795.65,4579.84 1802.5,4572.99 1802.5,4333 v1(1851,4284.5) ; R1.2 v1(1867.39,3958.61)
  Bottom Layer w15: v1(1851,4284.5) 1851,3975 v1(1867.39,3958.61)
MCU_D_P: R3.2 U1.4 | length 720.4
  Top Layer w15: R3.2 1749,3984 1790,4025 v1(1790,4083) ; U1.4 1757.99,4583.15 1770.65,4570.49 1770.65,4553.35 1775.99,4548 v1(1775.99,4295)
  Bottom Layer w15: v1(1775.99,4295) 1787.5,4295 1807,4275.5 1807,4100 v1(1790,4083)
NetC1_2: C1.2 U1.6 | length 224
  Top Layer w12: v1(1695,4573) U1.6
  Bottom Layer w12: v1(1695,4573) 1708.5,4586.5 C1.2
NetC3_2: C3.2 U1.17 Y1.1 | length 469.3
  Top Layer w12: Y1.1 1313.1,4190.2 1335.4,4212.5 v1@1335.4,4249 ; v1(1325.5,4250) 1334.4,4250 v1@1335.4,4249 ; U1.17 1350,4405 1335.4,4390.4 v1@1335.4,4249
  Bottom Layer w12: C3.2 v1(1325.5,4250)
NetC4_2: C4.2 U1.16 Y1.3 | length 593
  Top Layer w12: v1(1149,4292) 1178.72,4292 1179.72,4293 Y1.3 1180.72,4286 1304.4,4286 1318.4,4300 1318.4,4417.4 1337.5,4436.5 U1.16
  Bottom Layer w12: v1(1149,4292) 1159.4,4302.4 C4.2
NRST: C2.2 D2.2 J7.5 R2.2 U1.13 | length 1353.8
  Top Layer w12: C2.2 1250,4590 R2.2 ; D2.2 1259.2,4477 1250,4486.2 R2.2 ; J7.5 1807.48,4820 1806.48,4821 1806.48,4864 1789,4881.48 1789,4966.48 1775,4980.48 1531.98,4980.48 1514,4962.5 1514,4590 1522,4582 1522,4531.98 1521,4530.98 U1.13 1362.96,4530.98 1357,4525.03 R2.2
PDI: J1.3 J7.4 U1.10 | length 2549.3
  Top Layer w12: U1.10 1569.02,4950 1582.5,4963.48 1744,4963.48 1745,4962.48 J7.4
  Bottom Layer w12: J7.4 1776,4920 1776,4887.5 1793.5,4870 1875,4870 1889,4856 1889,4693 1858.5,4662.5 1743.5,4662.5 1731,4650 1731,4575.63 1704.77,4549.4 1667.6,4549.4 1654,4563 1594.4,4563 1581.4,4550 1581.4,4337.2 1600,4318.6 1812.5,4318.6 1827.27,4303.83 1827.27,3900 1920.53,3806.74 1944.77,3806.74 1958.04,3820 J1.3@2136.81,3820
PDO: J1.4 J7.1 U1.11 | length 1399.1
  Top Layer w12: v1(1540,4820) 1537.52,4817.52 U1.11 1537.52,4598 1540,4598 1540,4528 1541,4527 v1(1605,4527) ; v1(2094.31,4167.5) 2094.31,3921 2095.31,3920 J1.4@2136.81,3920
  Bottom Layer w12: v1(1540,4820) J7.1 ; v1(1605,4527) 1626,4527 1631.4,4532.4 1701.1,4532.4 1706.4,4527.1 1706.4,4525.23 2064.13,4167.5 v1(2094.31,4167.5)
RXLED: J1.6 U1.8 | length 850
  Top Layer w12: U1.8 1632.01,4524.49 v1(1682.4,4474.1)
  Bottom Layer w12: v1(1682.4,4474.1) 1682.4,4350 1696.8,4335.6 1859.4,4335.6 2075,4120 J1.6@2136.81,4120
SCLK: J1.2 J7.3 U1.9 | length 2425.1
  Top Layer w12: U1.9 1600.51,4725 1638.01,4762.5 1732.5,4762.5 1745,4775 J7.3 ; v1(2118,4190) 2111,4197 2075,4197 2062.81,4184.81 2062.81,4106.59 2077.31,4092.09 2077.31,3737.5 2094.81,3720 J1.2@2136.81,3720
  Bottom Layer w12: J7.3 1702,4820 1701,4950 1719,4968 1888,4968 1906,4950 1906,4625 1892.5,4611.5 1812.5,4611.5 1799.5,4598.5 1799.5,4511 1812.5,4498 2075,4498 2094.31,4478.69 2094.31,4199 v1(2118,4190)
TXLED: J1.5 U1.22 | length 1351.8
  Top Layer w12: U1.22 1506,4247.52 v1(1506,4144) ; v1(1721,3998) 1716,3993 1716,3822.5 1737.5,3801 1875,3801 1899,3825 1929.66,3825 v1(1935,3830.34)
  Bottom Layer w12: v1(1506,4144) 1737.5,4144 1751,4130.5 1751,4011.5 1737.5,3998 v1(1721,3998) ; v1(1935,3830.34) 1937.5,3832.84 1937.5,4020 J1.5@2136.81,4020
unused1: J1.1 U1.33 | length 756.2
  Top Layer w12: U1.33 1889.41,4180.59 1891.48,4178.52 1891.48,3873.16 1897.92,3866.72 1931.99,3866.72 1965,3833.71 1965,3730 2075,3620 J1.1@2136.81,3620
USB_D_N: D1.1 J2.2 J6.2 R1.1 | length 720.1
  Top Layer w15: J6.2@1564.41,3455 1564.41,3551 1583,3569.59 1583,3750 1596.74,3763.74 J2.2@1640,3763.74 ; R1.1 1829.21,3862.79 v1(1840,3852)
  Bottom Layer w15: J2.2@1640,3763.74 1710.43,3763.74 1802.19,3855.5 ; v1(1840,3852) 1805.69,3852 1802.19,3855.5 ; 1802.19,3855.5 1804.69,3858 D1.1 1802.19,3855.5
USB_D_P: D1.3 J2.3 J6.3 R3.1 | length 675.5
  Top Layer w15: J6.3@1590,3455 1590,3529 1640,3579 1640,3685 1682,3685 1697,3700 1697,3888 1696,3889 v1(1684.5,3889) ; v1(1745,3854) R3.1
  Bottom Layer w15: v1(1684.5,3889) 1759,3889 ; v1(1745,3854) 1745,3875 1759,3889 ; D1.3 1765.32,3889 1759,3889
VBUS: D1.5 F1.1 J2.1 J6.1 | length 1620.7
  Top Layer w12: v1(1528,3630) 1495.62,3630 ; J6.1@1538.82,3470 1538.82,3569.18 1495.62,3612.38 1495.62,3630 ; J2.1@1541.57,3763.74 1541.57,3744 1495.62,3698.05 1495.62,3630 ; v1(1785,3478.29) 1848.29,3478.29 2005,3635 v1(2005,3655) ; F1.1 2005,3859.45 v1(2005,3782.05)
  Bottom Layer w12: v1(1528,3630) 1633.29,3630 v1(1785,3478.29) ; J2.1@1541.57,3763.74 1541.57,3815.07 1695.5,3969 1784,3969 D1.5 ; v1(2005,3655) v1(2005,3782.05)
pads on no net: D1.4 D1.6 J6.4

## Polygon pours and split planes (outlines as drawn)
GND on Bottom Layer "Bottom Layer-GND" (solid, pour order 2): 2220,4998.78 1002.32,4998.78 1002.32,3283.78 2220,3283.78
GND on Top Layer "Top Layer-GND" (solid, pour order 0): 1000,5000 2220,5000 2220,3285 1000,3285

## Silkscreen, mask and mechanical layers (free items; w line width, h text height)
Top Overlay:
  text "D0" at 1135,4930 h30
  text "A5D19" at 1955,4930 h30
  text "A4D18" at 1955,4830 h30
  text "SDA" at 1130,4725 h30
  text "A3D17" at 1955,4725 h30
  text "SCL" at 1130,4640 h30
  text "A2D16" at 1955,4630 h30
  text "A1D15" at 1960,4525 h30
  text "A0D14" at 1955,4430 h30
  text "GND" at 2010,4330 h30
  text "5V" at 2040,4230 h30
  text "D8" at 1140,4110 h30
  text "D13" at 1135,3600 h30
Bottom Overlay:
  lines w0.5: 0.98,2.33 ccw(c2.64,2.45) 1.73,1.06 ccw(c4.18,3.52) 2.59,0.44 ccw(c3.56,2.38) 3.11,0.25 ccw(c3.21,2.72) 3.62,0.28 ccw(c3.54,0.79) 3.84,0.37 3.86,0.4 3.89,0.45 3.9,0.51 ccw(c3.44,0.46) 3.82,0.72 3.79,0.76 ccw(c-0.88,-2.66) 3.41,1.22 cw(c6.2,3.72) 3.02,1.75 cw(c3.92,2.3) 2.88,2.12 cw(c3.4,2.2) 2.99,2.53 cw(c3.62,2.03) 3.15,2.69 cw(c8.52,-4.05) 4.94,3.78 cw(c10.84,-9.13) 7.12,4.57 cw(c13.08,-16.68) 7.7,4.73 cw(c7.74,-70.05) 11.03,4.65 ccw(c16.52,129.22) 14.37,4.55 ccw(c14.92,53.26) 14.96,4.55 cw(c15.51,-10.49) 16.12,4.55 ccw(c16.57,15.44) 17.3,4.56 ccw(c17.05,8.26) 18.32,4.78 18.4,4.81 18.39,4.89 ccw(c17.33,4.79) 17.97,5.64 ccw(c16.67,3.87) 17.36,5.96 ccw(c13.28,-6.31) 16.52,6.2 cw(c18.02,11.57) 16.2,6.3 ccw(c-176.08,131.19) 17.05,7.63 cw(c28.7,0.06) 17.67,8.5 cw(c19.08,7.76) 18.04,8.97 18.1,9.01 cw(c18.67,8.25) 19.02,9.13 19.08,9.11 cw(c18.49,7.85) 19.74,8.45 cw(c18.34,7.76) 19.87,7.48 ccw(c27.98,10.62) 20.68,5.9 ccw(c24.92,8.64) 21.61,4.83 ccw(c23.95,7.57) 22.51,4.26 ccw(c22.98,5.32) 22.96,4.16 23.02,4.17 ccw(c22.98,4.72) 23.45,4.44 ccw(c22.59,4.93) 23.58,4.88 ccw(c21.74,4.97) 23.19,6.1 ccw(c22.19,5.29) 23,6.29 cw(c25.7,8.93) 22.13,7.7 22.1,7.79 cw(c27.77,9.6) 21.83,9.32 cw(c33.06,9.87) 21.87,10.99 cw(c41.42,8.65) 22.23,13.07 cw(c31.41,10.92) 23.22,15.59 cw(c39.34,6.52) 23.76,16.49 cw(c38.1,8.72) 24.26,17.35 ccw(c21.22,19.26) 24.72,18.44 ccw(c18.63,19.95) 24.77,18.69 cw(c38.25,21.18) 24.59,20.1 cw(c30.21,20.55) 24.63,21.35 cw(c27.67,20.91) 24.98,22.4 cw(c27.12,21.18) 25.12,22.62 ccw(c19.86,22.88) 25.04,23.82 cw(c219.57,59.46) 24.86,24.78 24.85,24.86 24.84,24.94 cw(c29.45,25.65) 24.9,26.69 ccw(c24.65,25.86) 24.24,26.63 ccw(c25.09,25.08) 23.79,26.27 ccw(c29.72,20.84) 23.27,25.64 cw(c18.55,29.15) 22.73,25.02 cw(c21.55,26.19) 22.25,24.68 22.18,24.65 22.12,24.63 cw(c21.89,25.66) 21.61,24.65 cw(c22.25,26.9) 21.01,24.91 cw(c26.7,34.09) 20.27,25.41 ccw(c16.39,20.15) 19.62,25.84 ccw(c18.78,24.34) 19.14,26.02 ccw(c18.98,25.27) 18.56,25.91 ccw(c22.21,25.28) 18.55,24.72 ccw(c27.59,26.11) 18.78,23.65 cw(c-1.58,17.96) 19.05,22.57 cw(c14.16,21.48) 19.17,21.36 cw(c17.72,20.86) 19.25,20.74 cw(c18.27,20.84) 18.94,20.12 cw(c17.75,21.42) 18.44,19.79 18.36,19.76 18.29,19.73 cw(c16.27,25.38) 17.29,19.47 ccw(c26.72,-34.76) 16.35,19.3 16.29,19.28 ccw(c17.45,11.26) 13.19,18.16 ccw(c18.15,10.14) 10.08,15.02 ccw(c18.24,10.05) 9.71,14.35 ccw(c18.44,9.3) 8.95,12.72 ccw(c35.52,3.15) 8.39,11 cw(c-25.24,20.73) 7.85,9.28 cw(c-3.8,13.39) 7.42,8.24 cw(c3.46,10.2) 6.39,6.89 cw(c1.72,12.19) 5.3,6.1 cw(c-5.02,23.75) 3.88,5.34 ccw(c14.36,-16.34) 2.46,4.6 ccw(c7.91,-4.69) 1.85,4.21 ccw(c3.12,2.48) 0.98,2.41 0.98,2.33
  text "Leonardo Mini v1.0 /   by Eric Gorkow" at 1460,4600 h30 r90
Mechanical 13:
  the board outline again, w6

## Text inside footprints (layer, text, board x,y; h text height)
C7: Top Overlay "+" at 1394.53,4110.01 h48 r180
J6: Mechanical 2 "PCB Edge" at 1515.47,3250.98 h24
J7: Top Overlay "5" at 1913.11,4795.2 h50; Top Overlay "6" at 1910.16,4900 h50; Top Overlay "2" at 1541.46,4893.62 h50; Top Overlay "1" at 1561.14,4795.2 h50